# Altium PCB PCB1.PcbDoc
Units mm, origin at the board's own origin, x right, y up, seen from the top; angles counter-clockwise.
Board outline 28 x 25 mm, 2 copper layers (Top Layer, Bottom Layer); 5 components, 6 nets, 13 pads, 0 vias.
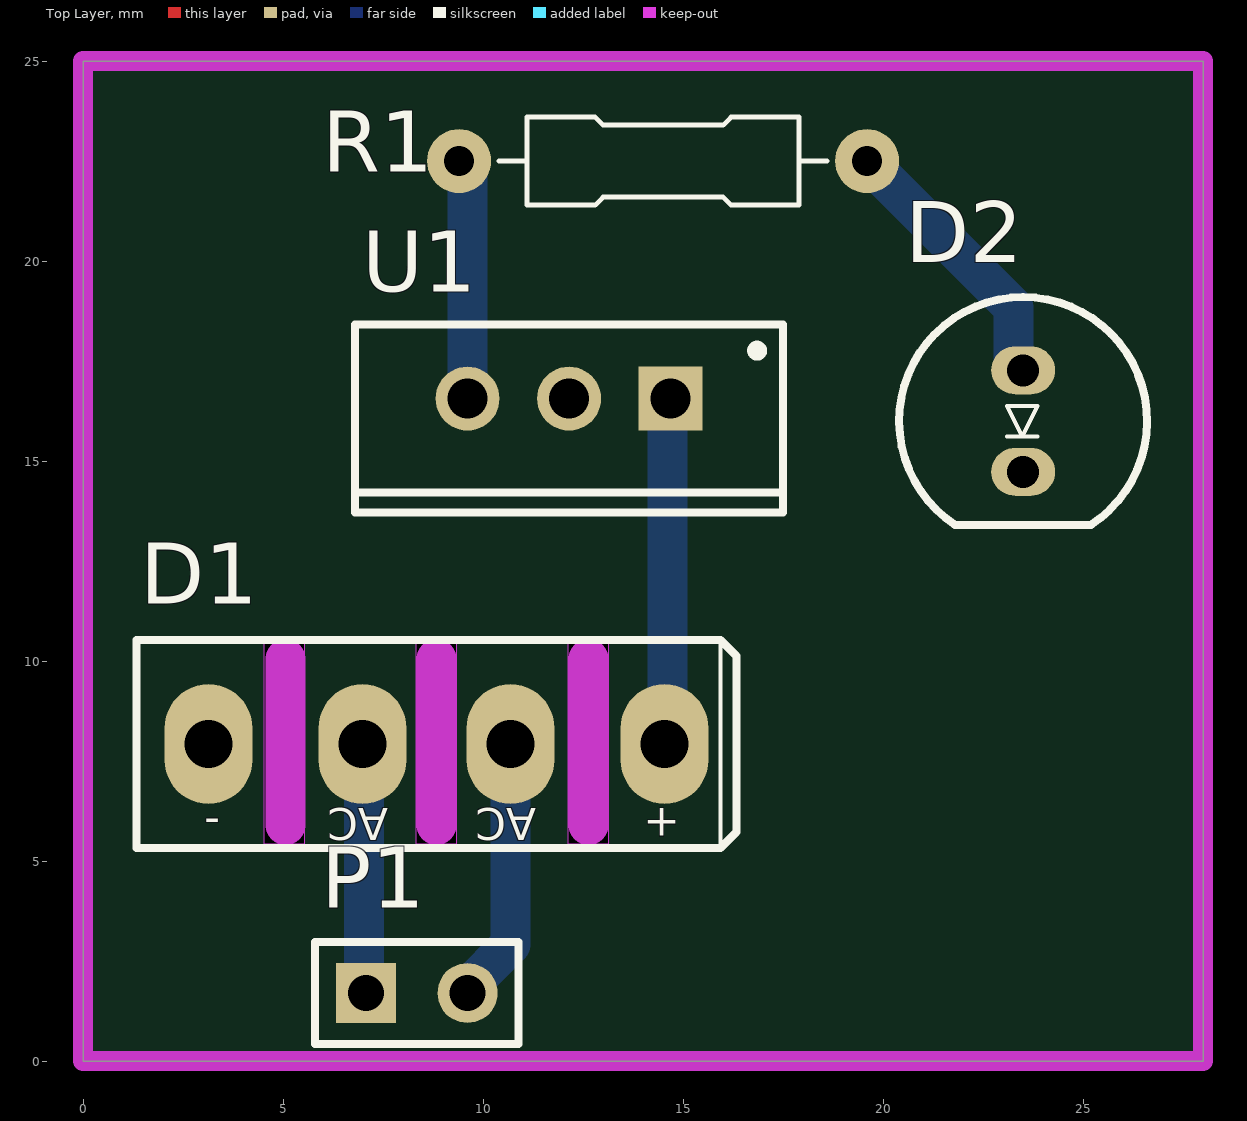
[diagram p0: Top Layer view]
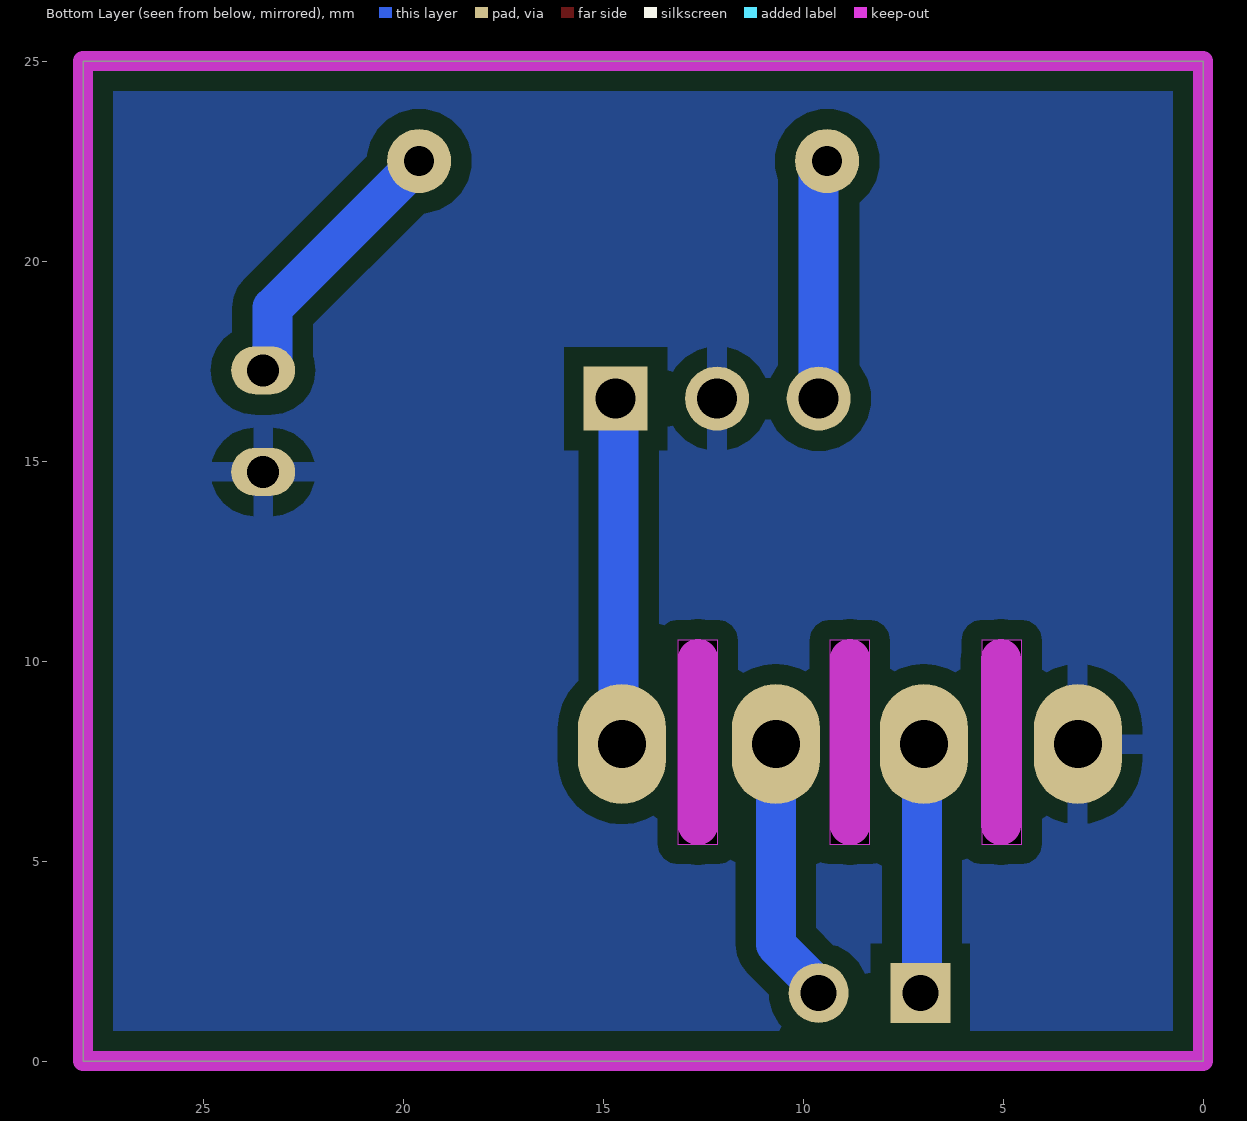
[diagram p1: Bottom Layer view, seen from below]
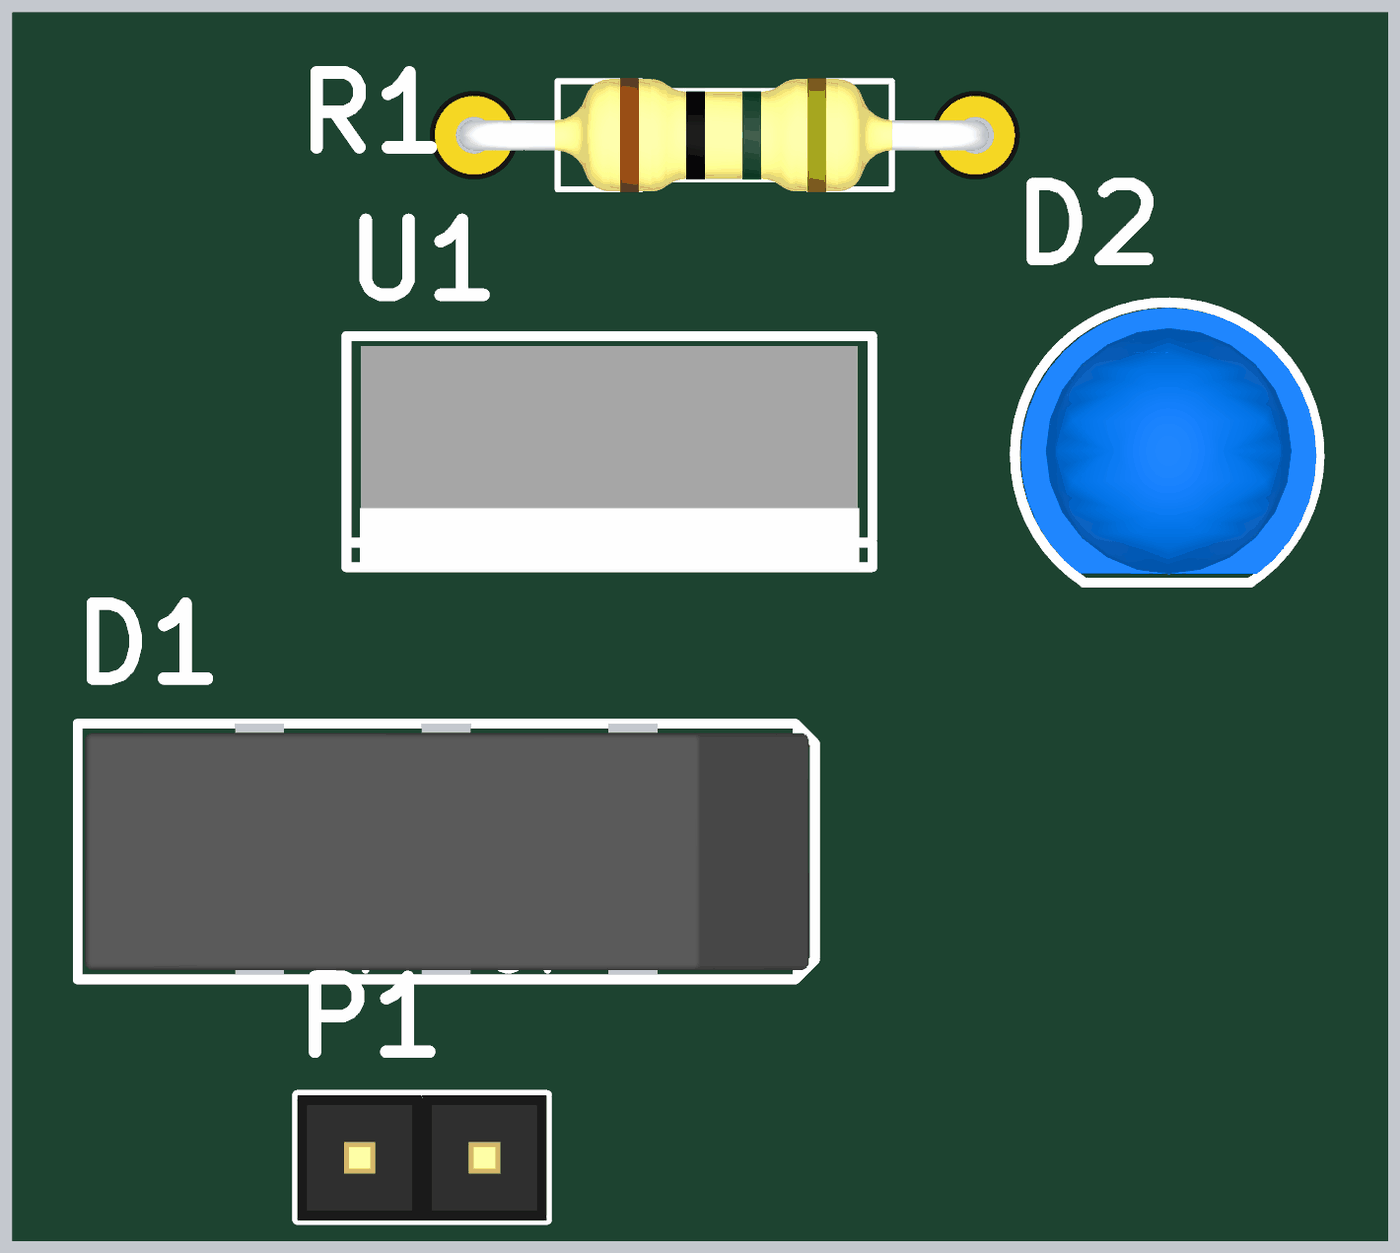
[diagram p2: 3D render of the assembled board from above, using the file's embedded part models]

## Layer stack, top to bottom
Top Solder: solder mask 0.0102, Solder Resist, Dk 3.5
Top Layer: signal copper 0.0356
Dielectric 1: dielectric 0.32, FR-4, Dk 4.8
Bottom Layer: signal copper 0.0356
Bottom Solder: solder mask 0.0102, Solder Resist, Dk 3.5

## Board outline
0,0 28,0 28,25 0,25

## Design rules (kind name [scope] priority, off if disabled: settings)
Clearance [All] p1: gap=0.5 ignorepadtopadclearanceinfootprint=FALSE except(0: Arc-Hole Track-Hole SMDPad-Hole THPad-Hole Via-Hole Fill-Hole Poly-Hole Region-Hole Text-Hole; 0.254: Arc-Arc Arc-Track Arc-SMDPad Track-Track Track-SMDPad SMDPad-SMDPad)
PolygonConnect [All] p1: connectstyle=Relief reliefconductorwidth=0.5 reliefentries=4 polygonreliefangle="90 Angle" airgapwidth=0.5
RoutingVias [All] p1: holewidth=0.711 width=1.27 viastyle="Through Hole" minholewidth=0.711 minwidth=1.27 maxholewidth=0.711 maxwidth=1.27
SolderMaskExpansion [All] p1: expansion=0.102 istentingtop=FALSE
Width [All] p1: maxlimit=2 minlimit=0.254 preferedwidth=1 minimp=50.000000 maximp=50.000000 favimp=50.000000
30 further rules are at their usual default settings.

## Classes and differential pairs
component class Sheet1: P1 R1 U1

## Components (designator, comment, footprint, x,y, rotation, side; value= is the part's Value field where it differs from the comment)
D1 "Diode Bridge" "Bridge KBP PACKAGE" 8.833,7.926 r180 top
D2 "LED 5MM" LED5MM_BLUE 23.5,16 r270 top
P1 "Header 2" HDR1X2 7.07,1.703 r0 top
R1 "1K" "Axial 0_25 W, 0_4 IN LEAD PITCH" 14.5,22.5 r0 top
U1 "L7805CV" "TO-220 AB" 12.15,16.562 r180 top

## Footprints (in the part's own frame and the unit in brackets; to place one, negate y for a bottom-side part, rotate by r counter-clockwise, add the part's x,y. Pads: shape width x height; smd on the part's side, far side on the other; paste and mask are expansions set on the pad)
"Axial 0_25 W, 0_4 IN LEAD PITCH" [mm] "Designer Abbas Basereh"
  round 1.6 hole 0.75: 1(5.1,0) 2(-5.1,0)
  silkscreen extent -4.1,-1.1 4.1,1.1, body extent -5.4,-1.16 5.36,1.16, height 3.63
"Bridge KBP PACKAGE" [mm] "KBP Bridge Rectifiers DESIGNER :ABBAS BASEREH"
  oval 2.2x3 hole 1.2: 1(-5.7,0) 2(-1.85,0) 3(1.85,0) 4(5.7,0)
  Keep-Out Layer board cut-out: -4.3,2.5 -3.3,2.5 -3.3,-2.6 -4.3,-2.6
  Keep-Out Layer board cut-out: -0.5,2.5 0.5,2.5 0.5,-2.6 -0.5,-2.6
  Keep-Out Layer board cut-out: 3.3,2.5 4.3,2.5 4.3,-2.6 3.3,-2.6
  Keep-Out Layer lines w1: 3.775,2.025 3.775,-2.125 ; 0,2.025 0,-2.125 ; -3.8,2.025 -3.8,-2.125
  silkscreen extent -7.5,-2.6 7.5,2.6, body extent -7.38,-2.42 7.35,2.41, height 12.49
HDR1X2 [mm] "Connector; Header; 2 Position"
  rect 1.5x1.5 hole 0.9: 1(0,0)
  round 1.5 hole 0.9: 2(2.54,0)
  silkscreen extent -1.27,-1.27 3.81,1.27, body extent -1.27,-1.28 3.81,1.26, height 8.79
LED5MM_BLUE [mm] "LED 5MM THROUGH HOLE BLUE-Designer Abbas Basereh"
  oval 1.2x1.6 hole 0.8: 1(-1.27,0) 2(1.27,0)
  silkscreen extent -3.1,-3.1 2.6,3.1, body extent -2.99,-2.98 2.43,3.04, height 12.31
"TO-220 AB" [mm] "Epoxy meets UL94, V0-Design:Abbas Basereh"
  rect 1.6x1.6 hole 1: 1(-2.54,0)
  round 1.6 hole 1: 2(0,0) 3(2.54,0)
  silkscreen extent -5.35,-1.85 5.35,2.85, body extent -5.08,-1.65 5.08,2.92, height 18.54

## Part data
D1: library part "Diode Bridge TOTAL SIZE", "Full Wave Diode Bridge", ComponentLink1Description=Datasheet, ComponentLink2Description=Reference, Design Date=1395/11/09, Designer="Abbas Basereh", Mounting Technology="Surface Mount\Through-Hole", Status=Unreleased
D2: "Light Emitting Diode", Data=16-12-2016, Designer="Abbas Basereh"
P1: "Header, 2-Pin", LatestRevisionDate=17-Jul-2002, LatestRevisionNote="Re-released for DXP Platform.", Publisher="Altium Limited"
R1: library part "RES Axial 0.25W", "RES Axial 0.25W", Data=4-1-2017, Desc.="RES Axial 0.25W", Designer="Abbas Basereh"
U1: library part "L7805CV-Linear Voltage Regulator IC Positive 1 Output 5V 1.5A TO-220AB", "Linear Voltage Regulator IC Positive FIXED", Manufacturer=STMicroelectronics, Designer="Abbas Basereh", Link=https://www.aliexpress.com/item/, Part. No=L7805CV

## Nets (pads, with @x,y where several pads share a name; then routed paths per layer and width w, separated by ;. In a path a pad name is that pad's centre, name@x,y a point inside that pad or via, vN(x,y) a via of type N, cw(c..) or ccw(c..) an arc to the next point about the centre after c; other vN are vias at no path point)
+5V: R1.2 U1.3 | length 6
  Bottom Layer w1: R1.2 9.4,22.338 9.61,22.128 U1.3
GND: D1.4 D2.2 U1.2
NetD1_1: D1.1 U1.1 | length 8.7
  Bottom Layer w1: D1.1 14.611,8.005 14.611,16.483 U1.1
NetD1_2: D1.2 P1.2 | length 6.7
  Bottom Layer w1: P1.2 9.61,1.838 10.683,2.911 D1.2
NetD1_3: D1.3 P1.1 | length 6.3
  Bottom Layer w1: D1.3 7.026,7.882 7.026,1.747 P1.1
NetD2_1: D2.1 R1.1 | length 6.9
  Bottom Layer w1: R1.1 23.262,18.838 23.262,17.362 23.354,17.27 D2.1

## Polygon pours and split planes (outlines as drawn)
GND on Bottom Layer "GND_L02_P000" (solid, pour order 0): 28,25 0,25 0,0 28,0

## Keep-outs
Keep-Out Layer:
  the board outline again, w0.5

## Text inside footprints (layer, text, board x,y; h text height)
D1: Top Overlay "+" at 14.933,6.326 h0.8 r180; Top Overlay "-" at 3.433,6.326 h0.8 r180; Top Overlay "AC" at 7.633,6.326 h0.8 r180; Top Overlay "AC" at 11.333,6.326 h0.8 r180